# Altium PCB Core CNC Shield.PcbDoc (part 2 of 2)
Units mm, origin at the board's own origin, x right, y up, seen from the top; angles counter-clockwise.
Board outline 51.13 x 88 mm, 4 copper layers (Top signal, Ground, Power, Bottom signal); 105 components, 109 nets, 541 pads, 191 vias.
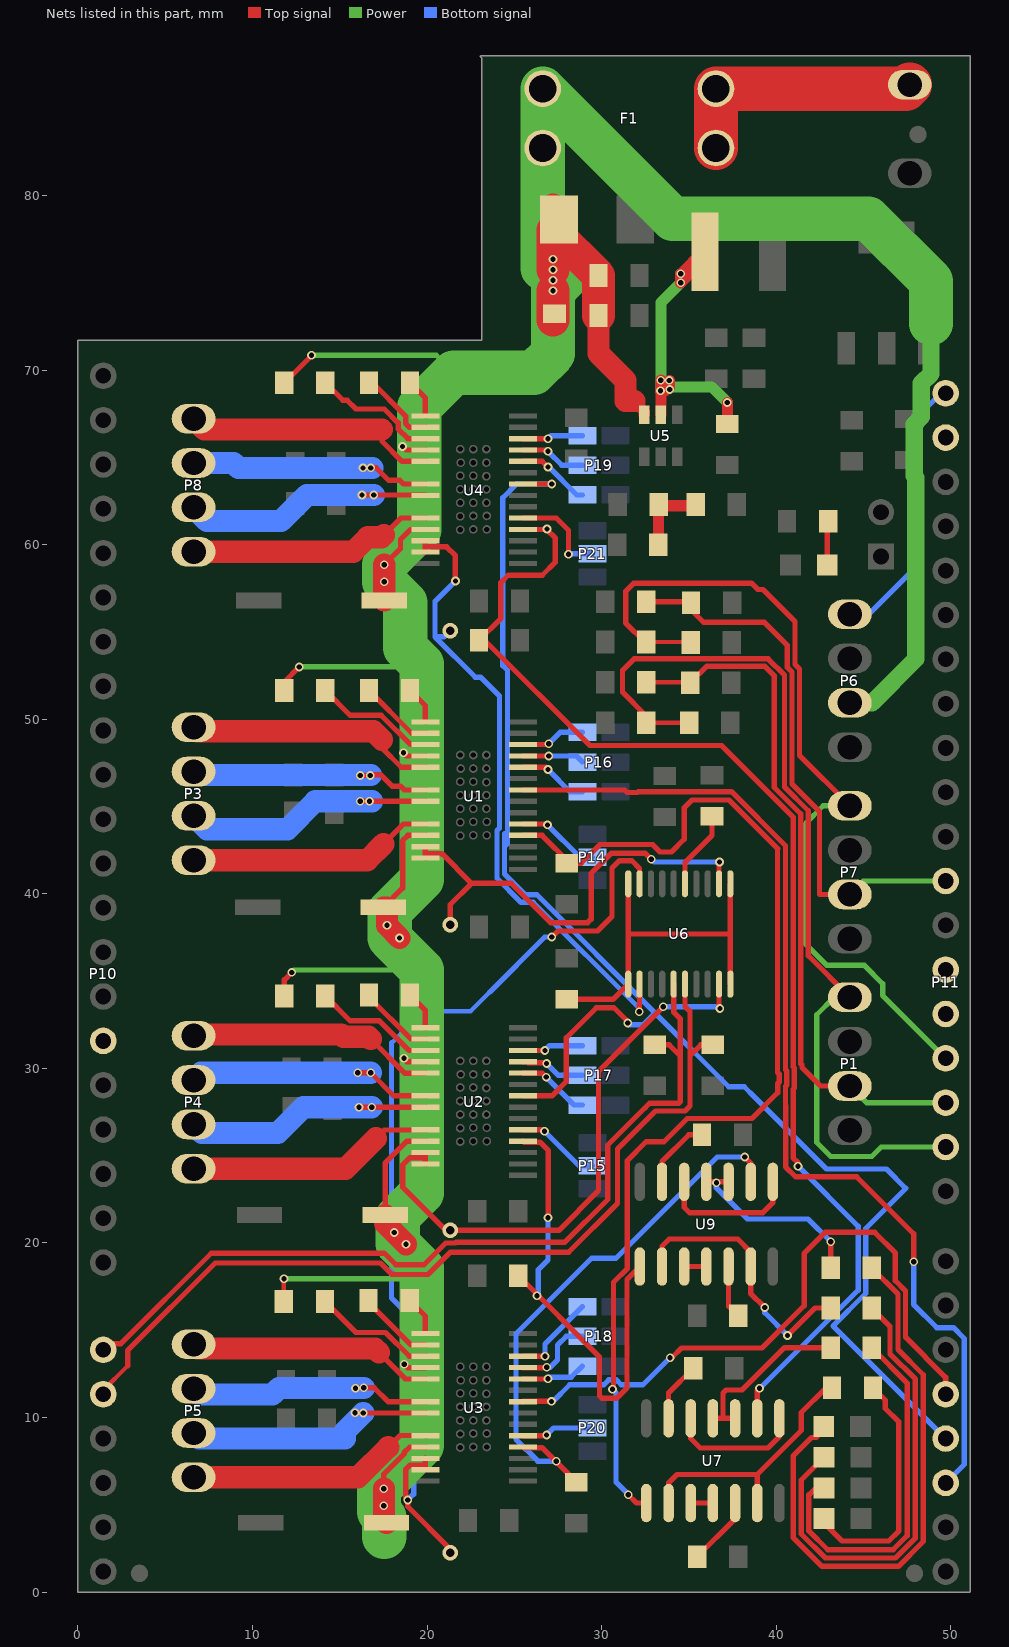
[diagram p4: the nets of this part, all layers, seen from the top]

## Via types
v1: diameter 0.5, hole 0.3, Top signal to Bottom signal, tented both sides, 191 vias

## Nets (pads, with @x,y where several pads share a name; then routed paths per layer and width w, separated by ;. In a path a pad name is that pad's centre, name@x,y a point inside that pad or via, vN(x,y) a via of type N, cw(c..) or ccw(c..) an arc to the next point about the centre after c; other vN are vias at no path point) (continued)
LEDX: R17.1 U7.2 U7.6 | length 15
  Top signal w0.305: U7.2@33.835,5.1 33.835,6.26 34.315,6.74 38.915,6.74 ; U7.6@38.915,5.1 38.915,6.74 ; R17.1@43.2,11.7 42.85,11.7 41.439,10.289 41.439,9.264 38.915,6.74
LEDY1: R19.1 U7.10 U7.11 | length 10
  Top signal w0.305: U7.11@36.375,9.95 36.95,9.95 ; U7.10@37.645,9.95 36.95,9.95 ; 38.088,11.613 38.05,11.575 ; R19.1@43.125,14 40.475,14 38.05,11.575 ; 36.95,9.95 36.95,11.4 37.125,11.575 38.05,11.575
LEDY2: R25.1 U9.2 U9.6 | length 15.5
  Top signal w0.305: U9.2@33.46,18.65 33.46,19.81 33.875,20.225 37.8,20.225 38.54,19.485 U9.6@38.54,18.65 38.54,17.11 v1(39.35,16.3) ; v1(40.65,14.7) 42.225,16.275 R25.1@43.125,16.275
  Bottom signal w0.305: v1(39.35,16.3) 39.35,16 v1(40.65,14.7)
LEDZ: R29.1 U9.10 U9.11 | length 10.9
  Top signal w0.305: U9.11@36,23.5 U9.10@37.27,23.5 ; R29.1@43.125,18.575 v1(43.125,20.075)
  Bottom signal w0.305: v1(36.575,23.45) 36.575,23.15 38.35,21.375 41.825,21.375 v1(43.125,20.075)
M1A1: P3.4 U1.5 | length 14.5
  Top signal w0.305: 17.425,48.825 17.425,48.35 18.525,47.25 U1.5@19.9,47.25
  Top signal w1.27: P3.4@6.625,49.545 6.859,49.311 16.939,49.311 17.425,48.825
M1A2: P3.3 U1.7 | length 14.4
  Top signal w0.305: v1(16.175,46.775) v1(16.75,46.775) 16.775,46.8 16.775,46.825 17.339,46.825 17.996,46.168 18.482,46.168 18.7,45.95 U1.7@19.9,45.95
  Bottom signal w1.27: P3.3@6.625,47.005 6.83,46.8 v1@16.775,46.8
M1B1: P3.1 U1.10 | length 14.1
  Top signal w0.305: 17.5,42.85 18.65,44 U1.10@19.9,44
  Top signal w1.27: P3.1@6.625,41.925 16.575,41.925 17.5,42.85
M1B2: P3.2 U1.8 | length 14.9
  Top signal w0.305: v1(16.175,45.3) 17.8,45.3 U1.8@19.9,45.3
  Bottom signal w1.27: P3.2@6.625,44.465 7.39,43.7 12,43.7 13.6,45.3 v1@16.85,45.3
  other v1: 16.7,45.3
M2A1: P4.4 U2.5 | length 14.2
  Top signal w0.305: 16.775,31.675 18.72,29.73 U2.5@19.9,29.73
  Top signal w1.27: P4.4@6.625,31.87 6.705,31.95 15.082,31.95 15.221,31.811 16.639,31.811 16.775,31.675
M2A2: P4.3 U2.7 | length 14.7
  Top signal w0.305: v1(16.025,29.75) v1(16.775,29.75) 18.095,28.43 U2.7@19.9,28.43
  Bottom signal w1.27: P4.3@6.625,29.33 7.045,29.75 v1(16.025,29.75) v1(16.775,29.75)
M2B1: P4.1 U2.10 | length 14.2
  Top signal w0.305: 17.075,26 17.55,26.475 19.895,26.475 U2.10@19.9,26.48
  Top signal w1.27: P4.1@6.625,24.25 15.325,24.25 17.075,26
M2B2: P4.2 U2.8 | length 14.8
  Top signal w0.305: v1(16.1,27.775) 16.105,27.78 v1(16.83,27.78) U2.8@19.9,27.78
  Bottom signal w1.27: P4.2@6.625,26.79 7.115,26.3 11.45,26.3 12.925,27.775 v1(16.1,27.775) 16.825,27.775 v1(16.83,27.78)
M3A1: P5.4 U3.5 | length 14.1
  Top signal w0.305: 17.25,13.72 18.76,12.21 U3.5@19.9,12.21
  Top signal w1.27: P5.4@6.625,14.195 6.859,13.961 17.009,13.961 17.25,13.72
M3A2: P5.3 U3.7 | length 14.4
  Top signal w0.305: v1(15.9,11.675) 15.925,11.7 16.975,11.7 17.765,10.91 U3.7@19.9,10.91
  Bottom signal w1.27: P5.3@6.625,11.655 6.955,11.325 11.15,11.325 11.525,11.7 v1(16.375,11.7)
M3B1: P5.1 U3.10 | length 14.3
  Top signal w0.305: 17.775,8.3 18.45,8.975 19.885,8.975 U3.10@19.9,8.96
  Top signal w1.27: P5.1@6.625,6.575 16.05,6.575 17.775,8.3
M3B2: P5.2 U3.8 | length 14.7
  Top signal w0.305: v1(15.875,10.275) 15.89,10.26 v1(16.35,10.26) U3.8@19.9,10.26
  Bottom signal w1.27: P5.2@6.625,9.115 6.94,8.8 15.3,8.8 15.3,9.21 v1(16.35,10.26)
M4A1: P8.4 U4.5 | length 14.7
  Top signal w0.305: 17.425,66.6 17.425,65.925 18.575,64.775 U4.5@19.9,64.775
  Top signal w1.27: P8.4@6.625,67.22 7.245,66.6 17.425,66.6
M4A2: P8.3 U4.7 | length 14.3
  Top signal w0.305: v1(16.325,64.4) 17.089,64.4 17.796,63.693 18.432,63.693 18.65,63.475 U4.7@19.9,63.475
  Bottom signal w1.27: P8.3@6.625,64.68 8.92,64.68 9.2,64.4 v1@16.875,64.4
  other v1: 16.775,64.4
M4B1: P8.1 U4.10 | length 14.1
  Top signal w0.305: 17.525,60.55 18.5,61.525 U4.10@19.9,61.525
  Top signal w1.27: P8.1@6.625,59.6 15.775,59.6 16.6,60.425 17.4,60.425 17.525,60.55
M4B2: P8.2 U4.8 | length 15.2
  Top signal w0.305: v1(16.275,62.85) 17.775,62.85 19.875,62.85 U4.8@19.9,62.825
  Bottom signal w1.27: P8.2@6.625,62.14 7.402,61.363 11.638,61.363 13.125,62.85 v1(16.95,62.85) 16.675,62.85
NetC1_1: C1.1 U1.2 | length 4.2
  Top signal w0.305: C1.1@16.675,51.65 19.125,49.2 U1.2@19.9,49.2
NetC1_2: C1.2 U1.1 | length 2.2
  Top signal w0.305: C1.2@19.025,51.65 19.9,50.775 U1.1@19.9,49.85
NetC2_1: C2.1 U2.2 | length 4.3
  Top signal w0.305: C2.1@16.675,34.2 16.675,34.075 19.07,31.68 U2.2@19.9,31.68
NetC2_2: C2.2 U2.1 | length 2.2
  Top signal w0.305: C2.2@19.025,34.2 19.9,33.325 U2.1@19.9,32.33
NetC3_1: C3.1 U3.2 | length 4.4
  Top signal w0.305: C3.1@16.65,16.7 16.65,16.6 19.09,14.16 U3.2@19.9,14.16
NetC3_2: C3.2 U3.1 | length 2.3
  Top signal w0.305: C3.2@19,16.7 19.9,15.8 U3.1@19.9,14.81
NetC7_1: C7.1 U1.3 | length 7
  Top signal w0.305: C7.1@14.175,51.65 15.6,50.225 17.375,50.225 19.05,48.55 U1.3@19.9,48.55
NetC10_1: C10.1 U2.3 | length 7
  Top signal w0.305: C10.1@14.175,34.15 15.6,32.725 17.274,32.725 18.974,31.025 19.895,31.025 U2.3@19.9,31.03
NetC13_1: C13.1 U3.3 | length 7.1
  Top signal w0.305: C13.1@14.15,16.65 15.925,14.875 17.624,14.875 18.989,13.51 U3.3@19.9,13.51
NetC19_1: C19.1 U4.2 | length 4.5
  Top signal w0.305: C19.1@16.675,69.275 16.875,69.275 18.775,67.375 18.775,66.95 19,66.725 U4.2@19.9,66.725
NetC19_2: C19.2 U4.1 | length 2.3
  Top signal w0.305: C19.2@19.025,69.275 19.9,68.4 U4.1@19.9,67.375
NetC23_1: C23.1 U4.3 | length 7.3
  Top signal w0.305: C23.1@14.175,69.275 15.175,68.275 15.425,68.275 15.925,67.775 17.55,67.775 18.343,66.982 18.343,66.632 18.9,66.075 U4.3@19.9,66.075
NetC25_1: C25.1 R26.1 R27.2 | length 4.6
  Top signal w0.635: C25.1@33.25,60 R27.2@33.25,62.203 ; R27.2@33.275,62.3 33.25,62.275 R27.2@33.25,62.231 ; R27.2@33.348,62.104 R27.2@33.25,62.203 ; R26.1@35.316,62.231 R27.2@33.25,62.231 ; R27.2@33.25,62.203 R27.2@33.25,62.231 ; R27.2@33.25,62.203 33.221,62.231 R27.2@33.25,62.231
NetD2_2: D2.2 R17.2 | length 14
  Top signal w0.305: D2.2@42.75,4.225 42.75,3.95 43.775,2.925 46.45,2.925 47.025,3.5 47.025,9.75 46.25,10.525 46.25,11 R17.2@45.55,11.7
NetD3_1: D3.1 R14.2 | length 2.5
  Top signal w0.305: D3.1@42.925,58.825 R14.2@42.925,61.3
NetD4_2: D4.2 R19.2 | length 21.1
  Top signal w0.305: D4.2@42.75,5.95 42.25,5.95 41.871,5.571 41.871,3.509 42.955,2.425 46.7,2.425 47.5,3.225 47.5,11.975 R19.2@45.475,14
NetD5_2: D5.2 R25.2 | length 26.7
  Top signal w0.305: D5.2@42.75,7.725 41.439,6.414 41.439,3.33 42.819,1.95 46.836,1.95 47.975,3.089 47.975,12.2 46.525,13.65 46.525,15.225 R25.2@45.475,16.275
NetD6_2: D6.2 R29.2 | length 32.8
  Top signal w0.305: D6.2@42.725,9.475 42.725,9.295 42.287,8.858 42.033,8.858 40.975,7.8 40.975,3.125 42.625,1.475 47,1.475 48.425,2.9 48.425,12.45 46.975,13.9 46.975,17.075 R29.2@45.475,18.575
NetF1_1: F1.1 P2.2 | length 14.6
  Top signal w2.54: F1.1@36.55,82.725 F1.1@36.55,86.125 47.42,86.125 P2.2@47.65,86.355
NetP14_1: P14.1 U1.19 | length 4.8
  Top signal w0.305: U1.19@25.5,44 26.85,44 v1(26.9,43.95)
  Bottom signal w0.305: v1(26.9,43.95) 28.75,42.1 P14.1@29.475,42.1
NetP15_1: P15.1 U2.19 | length 4.8
  Top signal w0.305: U2.19@25.5,26.48 26.645,26.48 v1(26.725,26.4)
  Bottom signal w0.305: v1(26.725,26.4) 28.7,24.425 P15.1@29.475,24.425
NetP16_4: P16.4 U1.26 | length 3.7
  Top signal w0.305: U1.26@25.5,48.55 26.925,48.55 v1(26.975,48.6)
  Bottom signal w0.305: v1(26.975,48.6) 27.625,49.25 P16.4@28.9,49.25
NetP16_5: P16.5 U1.25 | length 3.5
  Top signal w0.305: U1.25@25.5,47.9 v1(26.975,47.9)
  Bottom signal w0.305: v1(26.975,47.9) 28.55,47.9 P16.5@28.9,47.55
NetP16_6: P16.6 U1.24 | length 4
  Top signal w0.305: U1.24@25.5,47.25 26.8,47.25 v1(26.925,47.125)
  Bottom signal w0.305: v1(26.925,47.125) 28.2,45.85 P16.6@28.9,45.85
NetP17_4: P17.4 U2.26 | length 3.5
  Top signal w0.305: U2.26@25.5,31.03 26.745,31.03 v1(26.75,31.025)
  Bottom signal w0.305: v1(26.75,31.025) 27.025,31.3 P17.4@28.9,31.3
NetP17_5: P17.5 U2.25 | length 3.7
  Top signal w0.305: U2.25@25.5,30.38 25.73,30.38 25.785,30.325 26.8,30.325 v1(26.85,30.275)
  Bottom signal w0.305: v1(26.85,30.275) 27.525,29.6 P17.5@28.9,29.6
NetP17_6: P17.6 U2.24 | length 4.2
  Top signal w0.305: U2.24@25.5,29.73 26.595,29.73 v1(26.825,29.5)
  Bottom signal w0.305: v1(26.825,29.5) 28.425,27.9 P17.6@28.9,27.9
NetP18_4: P18.4 U3.26 | length 5
  Top signal w0.305: U3.26@25.5,13.51 v1(26.76,13.51)
  Bottom signal w0.305: v1(26.76,13.51) 26.76,14.21 P18.4@28.9,16.35
NetP18_5: P18.5 U3.25 | length 4.6
  Top signal w0.305: U3.25@25.5,12.86 26.84,12.86 v1(26.855,12.875)
  Bottom signal w0.305: v1(26.855,12.875) 27.05,12.875 27.475,13.3 27.475,14.15 27.975,14.65 P18.5@28.9,14.65
NetP18_6: P18.6 U3.24 | length 3.7
  Top signal w0.305: U3.24@25.5,12.21 26.91,12.21 v1(26.925,12.225)
  Bottom signal w0.305: v1(26.925,12.225) 27.007,12.307 28.257,12.307 P18.6@28.9,12.95
NetP19_4: P19.4 U4.26 | length 3.5
  Top signal w0.305: U4.26@25.5,66.075 v1(26.925,66.075)
  Bottom signal w0.305: v1(26.925,66.075) 27.1,66.25 P19.4@28.9,66.25
NetP19_5: P19.5 U4.25 | length 3.8
  Top signal w0.305: U4.25@25.5,65.425 26.85,65.425 v1(26.925,65.35)
  Bottom signal w0.305: v1(26.925,65.35) 27.725,64.55 P19.5@28.9,64.55
NetP19_6: P19.6 U4.24 | length 4.2
  Top signal w0.305: U4.24@25.5,64.775 26.6,64.775 v1(26.925,64.45)
  Bottom signal w0.305: v1(26.925,64.45) 26.975,64.45 28.575,62.85 P19.6@28.9,62.85
NetP20_1: P20.1 U3.19 | length 4.2
  Top signal w0.305: U3.19@25.5,8.96 26.81,8.96 v1(26.85,9)
  Bottom signal w0.305: v1(26.85,9) 27.25,9.4 P20.1@29.475,9.4
NetP21_1: P21.1 U4.19 | length 5.7
  Top signal w0.305: U4.19@25.5,61.525 27.4,61.525 28.1,60.825 v1(28.1,59.45)
  Bottom signal w0.305: v1(28.1,59.45) 28.125,59.475 P21.1@29.475,59.475
NetR8_1: R8.1 U6.1 U6.10 U6.11 U6.20 | length 21.2
  Top signal w0.305: R8.1@27.996,33.957 30.657,33.957 U6.1@31.525,34.825 31.525,37.7 ; U6.20@31.525,40.575 31.525,37.7 ; 37.3,37.7 31.525,37.7 ; U6.10@37.375,34.825 U6.11@37.375,40.575
NetR9_1: R9.1 U6.15 | length 4.5
  Top signal w0.305: U6.15@34.775,40.575 34.775,41.8 36.325,43.35 R9.1@36.325,44.45
NetR21_1: R21.1 U7.5 | length 4
  Top signal w0.305: R21.1@35.475,2.025 37.645,4.195 U7.5@37.645,5.1
NetR23_1: R23.1 U7.13 | length 3.5
  Top signal w0.305: U7.13@33.835,9.95 33.835,11.41 R23.1@35.25,12.825
NetR30_1: R30.1 U9.13 | length 4.1
  Top signal w0.305: U9.13@33.46,23.5 33.46,24.66 35,26.2 R30.1@35.75,26.2
NetR31_1: R31.1 U9.5 | length 3.1
  Top signal w0.305: U9.5@37.27,18.65 37.27,16.38 R31.1@37.825,15.825
NetU7_3: U7.3 U7.4 | length 1.3
  Top signal w0.305: U7.3@35.105,5.1 U7.4@36.375,5.1
NetU7_8: U7.8 U7.12 | length 7.8
  Top signal w0.305: U7.12@35.105,9.95 35.105,8.795 35.65,8.25 39.525,8.25 40.185,8.91 U7.8@40.185,9.95
NetU9_3: U9.3 U9.4 | length 1.3
  Top signal w0.305: U9.3@34.73,18.65 U9.4@36,18.65
NetU9_8: U9.8 U9.12 | length 8.1
  Top signal w0.305: U9.12@34.73,23.5 34.73,22.045 35.05,21.725 39.225,21.725 39.81,22.31 U9.8@39.81,23.5
P0W: T1.1 U1.12 U1.13 U6.12 | length 26.7
  Top signal w0.305: U1.13@19.9,42.05 19.9,42.4 ; U1.12@19.9,42.7 19.9,42.4 ; T1.1@21.325,38.234 21.325,39.375 22.55,40.6 ; v1(32.85,41.975) 32.493,42.332 30.557,42.332 29.4,41.175 29.4,38.55 29.2,38.35 27.075,38.35 24.825,40.6 22.55,40.6 ; U6.12@36.725,40.575 v1@36.725,41.825 ; 19.9,42.4 20,42.3 20.85,42.3 22.55,40.6
  Bottom signal w0.305: v1(32.85,41.975) 33,41.825 v1(36.75,41.825)
P1W: T3.1 U2.12 U2.13 U6.9 | length 33.1
  Top signal w0.305: U2.13@19.9,24.53 19.9,24.875 ; U2.12@19.9,25.18 19.9,24.875 ; T3.1@21.075,20.725 18.6,23.2 18.6,24.475 19,24.875 19.9,24.875 ; T3.1@21.325,20.725 27.55,20.725 29.825,23 29.825,29.825 v1(33.525,33.525) ; v1@36.725,33.425 U6.9@36.725,34.825
  Bottom signal w0.305: v1(33.525,33.525) 36.675,33.525 v1(36.775,33.425)
P2W: T2.1 U3.12 U3.13 U6.19 | length 56.1
  Top signal w0.305: U3.13@19.9,7.01 19.9,7.275 ; U3.12@19.9,7.66 19.9,7.275 ; T2.1@21.325,2.25 21.325,2.475 18.895,4.905 v1(18.895,5.275) 18.775,5.395 18.775,7.025 19.025,7.275 19.9,7.275 ; v1(27.15,37.525) 27.5,37.875 29.775,37.875 30.6,38.7 30.6,41.475 31.025,41.9 31.725,41.9 32.175,41.45 U6.19@32.175,40.575
  Bottom signal w0.254: 17.963,31.475 17.995,31.475 19.795,33.275 22.495,33.275 23.595,34.375
  Bottom signal w0.305: 17.963,31.475 17.963,21.129 17.906,21.129 17.596,20.819 17.596,20.381 17.906,20.071 17.963,20.071 17.963,16.844 18.852,15.955 ; v1(18.895,5.275) 19.229,5.609 19.229,15.578 18.895,15.912 ; 23.595,34.375 26.745,37.525 v1(27.15,37.525)
P3W: T4.1 U4.12 U4.13 U6.2 | length 37.5
  Top signal w0.305: U4.13@19.9,59.575 19.9,59.875 ; U4.12@19.9,60.225 19.9,59.875 ; v1(21.625,57.925) 21.625,59.375 21.125,59.875 19.9,59.875 ; v1(32.154,33.25) 32.154,33.629 ; v1@32.175,33.45 U6.2@32.175,34.825
  Bottom signal w0.305: T4.1@21.325,55.075 20.971,54.721 20.453,54.721 ; v1(21.625,57.925) 20.453,56.753 20.453,54.721 ; v1(32.154,33.25) 32.154,33.446 26.086,39.514 25.386,39.514 24.007,40.893 24.007,43.62 24.15,43.763 24.15,51.324 23.06,52.414 22.761,52.414 20.453,54.721
"POT SCL": P10.22 R11.1 U6.5 | length 49.8
  Top signal w0.254: P10.22@1.449,14.096 P10.22@1.576,14.223
  Top signal w0.305: P10.22@1.576,14.223 2.451,14.223 7.637,19.409 17.556,19.409 18.215,18.75 19.825,18.75 21.071,19.996 21.627,19.996 21.665,20.034 27.884,20.034 30.35,22.5 30.35,25.606 32.489,27.746 32.494,27.746 32.757,28.009 34.434,28.009 34.5,28.075 34.5,30.725 ; R11.1@33.05,31.35 33.875,31.35 34.5,30.725 ; U6.5@34.125,34.825 34.125,33.225 34.5,32.85 34.5,30.725
"POT SDA": P10.23 R10.1 U6.6 | length 51.9
  Top signal w0.254: P10.23@1.449,11.556 2.846,12.953
  Top signal w0.305: 2.846,12.953 2.846,13.828 7.868,18.85 17.325,18.85 17.984,18.191 20.056,18.191 21.34,19.475 28.115,19.475 30.909,22.269 30.909,25.375 33.095,27.561 34.776,27.561 35.059,27.844 35.059,30.725 ; U6.6@34.775,34.825 34.775,33.55 35.059,33.266 35.059,30.725 ; R10.1@36.375,31.35 35.684,31.35 35.059,30.725
PWM0: P6.4 P11.54 | length 15.7
  Bottom signal w0.305: P6.4@44.225,56.02 45.32,56.02 47.925,58.625 47.925,67.175 47.938,67.163 49.45,68.675 P11.54@49.71,68.675
PWM1: P11.53 | length 0.6
  Bottom signal w0.305: P11.53@49.137,66.356 P11.53@49.709,66.356
RESET: P10.16
STP1: P11.30 U1.22 | length 60.2
  Top signal w0.305: U1.22@25.5,45.95 31.325,45.95 31.468,45.807 32.058,45.807 32.106,45.854 37.431,45.854 40.532,42.754 40.532,29.928 40.611,29.848 40.611,29.052 40.532,28.972 40.532,27.868 40.543,27.857 40.543,24.358 41.108,23.793 44.607,23.793 47.875,20.525 v1(47.875,18.925)
  Bottom signal w0.305: v1(47.875,18.925) 47.875,16.475 49.2,15.15 50.15,15.15 50.775,14.525 50.775,7.32 P11.30@49.71,6.255
STP2: P11.31 U2.22 U4.22 | length 88.3
  Top signal w0.305: U2.22@25.5,28.43 27.155,28.43 27.975,29.25 27.975,31.75 29.7,33.475 30.7,33.475 31.5,32.675 v1(31.5,32.6) ; U4.22@25.5,63.475 v1(27.15,63.475)
  Bottom signal w0.305: 24.438,43.441 24.438,42.721 ; v1(27.15,63.475) 25.125,63.475 24.341,62.691 24.341,53.072 24.607,52.806 24.607,42.89 24.438,42.721 ; v1(31.5,32.6) 31.6,32.5 32.375,32.5 33.055,33.18 ; P11.31@49.71,8.795 43.258,15.247 45.132,17.121 45.132,20.833 47.424,23.126 46.318,24.232 42.879,24.232 38.754,28.356 38.754,28.369 38.174,28.95 37.286,28.95 33.055,33.18 ; 24.438,42.721 24.438,41.147 25.64,39.946 26.29,39.946 33.055,33.18
STP3: P11.32 U3.22 | length 37.4
  Top signal w0.254: P11.32@49.385,11.335 P11.32@49.71,11.335
  Top signal w0.305: U3.22@25.5,10.91 25.515,10.925 v1(27.125,10.925) ; v1(33.925,13.425) 34.018,13.425 34.575,13.982 39.177,13.982 41.6,16.405 41.6,19.4 42.804,20.604 45.646,20.604 46.825,19.425 46.825,17.836 47.407,17.254 47.407,14.604 49.71,12.301 P11.32@49.71,11.335
  Bottom signal w0.305: v1(27.125,10.925) 27.225,10.925 28.175,11.875 30.127,11.875 30.407,12.155 30.846,12.155 31.126,11.875 32.375,11.875 v1(33.925,13.425)
SW: C9.1 L1.1 U5.2 | length 21.1
  Top signal w0.635: v1(33.378,68.812) v1@33.391,68.812 ; U5.2@33.391,67.443 v1@33.391,68.812 ; v1(33.391,69.418) v1@33.391,69.037 ; v1(33.878,69.412) 33.878,69.012 v1@33.853,69.037 ; L1.1@35.931,76.403 v1(34.534,75.006) v1(34.534,75.514) 35.804,76.784 L1.1@35.931,76.784 ; C9.1@37.201,66.91 v1(37.201,68.148) ; v1@33.391,68.812 v1@33.391,69.037 ; v1@33.391,68.812 v1@33.403,68.812 ; v1@33.391,69.037 v1@33.853,69.037 ; v1@33.391,69.037 33.428,69 v1@33.428,68.812 ; v1@33.403,68.812 v1@33.428,68.812 ; v1@33.403,68.812 33.428,68.787 v1@33.428,68.812 ; v1@33.428,68.812 33.628,68.812 v1@33.853,69.037
  Power w0.635: v1(34.534,75.514) v1(34.534,75.006) 33.391,73.863 v1(33.391,69.418) 33.391,69.037 36.312,69.037 v1(37.201,68.148)
  Bottom signal w0.635: v1(33.378,68.812) 33.403,68.812 v1@33.391,68.824 ; v1(34.534,75.006) v1(34.534,75.514)
  other v1: 33.903,68.887
VM: C4.1 C5.1 C6.1 C7.2 C10.2 C12.2 C13.2 C15.1 C21.1 C23.2 D1.2 F1.2 P6.2 R15.2 U1.4 U1.11 U2.4 U2.11 U3.4 U3.11 U4.4 U4.11 U5.3 | length 241.7
  Top signal w0.254: C13.2@11.8,16.65 v1(11.8,17.95)
  Top signal w0.305: C10.2@11.825,34.15 11.825,35.075 v1(12.25,35.5) ; C7.2@11.825,51.65 11.825,52.15 v1(12.675,53) v1@12.725,53.05 ; C23.2@11.825,69.275 13.375,70.825 v1(13.375,70.85) ; C4.1@17.5,39.225 18.6,40.325 18.6,43.05 18.9,43.35 U1.11@19.9,43.35 ; v1(17.525,5.925) 17.525,6.757 18.689,7.921 18.689,7.989 19.01,8.31 U3.11@19.9,8.31 ; v1(17.55,58.85) 18.475,59.775 18.475,60.3 19.05,60.875 U4.11@19.9,60.875 ; C5.1@17.6,21.6 17.6,24.575 18.855,25.83 U2.11@19.9,25.83 ; v1(18.6,65.625) 18.8,65.425 U4.4@19.9,65.425 ; v1(18.65,48.075) 18.825,47.9 U1.4@19.9,47.9 ; v1(18.675,30.575) 18.65,30.575 18.845,30.38 U2.4@19.9,30.38 ; v1@18.7,13.1 v1(18.7,13.05) 18.89,12.86 U3.4@19.9,12.86
  Top signal w0.635: 31.887,68.222 32.441,67.668 U5.3@32.441,67.443
  Top signal w1.27: C4.1@17.5,39.225 17.7,39.225 v1(17.7,38.2) v1(18.425,37.475) ; v1(17.525,5.925) v1(17.525,4.95) 17.525,4.125 C6.1@17.675,3.975 ; C21.1@17.55,56.8 v1(17.55,57.875) v1(17.55,58.85) ; C5.1@17.6,21.6 17.6,21.125 v1(18.125,20.6) v1(18.8,19.925) ; v1(27.22,74.55) v1(27.22,75.15) v1(27.22,75.75) ; C15.1@29.788,75.45 C15.1@29.818,75.42 ; C12.2@29.818,73.134 29.818,70.957 31.368,69.407 31.368,68.222 31.887,68.222 ; D1.2@27.208,78.03 27.208,79.484 27.22,79.472 27.22,78.018 D1.2@27.208,78.03
  Top signal w1.905: R15.2@27.22,72.875 v1(27.22,74.55) ; v1(27.22,75.75) v1(27.22,76.35) 27.22,78.018 C15.1@29.818,75.42 C12.2@29.818,73.134
  Power w0.305: v1(11.8,17.95) 19.062,17.95 19.7,18.588 ; v1(12.25,35.5) 12.386,35.636 19.7,35.636 ; v1(12.675,53) 19.538,53 19.7,53.162 ; v1(13.375,70.85) 20.525,70.85 21.525,69.85
  Power w1: P6.2@44.225,50.94 45.49,50.94 48.002,53.452 48.002,63.846 47.9,63.948 47.9,66.913 48.321,67.334 48.321,68.1 48.321,69.25 48.87,69.799 48.87,72.675
  Power w2.54: 17.55,3.177 17.55,4.291 17.248,4.593 17.248,5.957 19.7,8.409 19.7,18.588 18.328,19.96 18.328,21.49 19.7,22.862 19.7,35.636 17.867,37.469 17.867,38.999 19.7,40.832 19.7,53.162 18.756,54.106 18.756,56.669 v1(17.55,57.875) v1(17.55,58.85) 19.55,60.85 19.55,67.875 21.525,69.85 26.12,69.85 27.22,70.95 v1(27.22,74.55) ; 26.63,75.835 F1.2@26.63,82.725 F1.2@26.63,86.125 34.08,78.675 45.279,78.675 48.87,75.084 48.87,72.675 ; v1(27.22,76.35) v1(27.22,75.75) v1(27.22,75.15) v1(27.22,74.55) ; 27.98,75.31 v1(27.22,74.55)
"X FAULT": R32.2 U1.18 U7.1 | length 64.8
  Top signal w0.305: U1.18@25.5,43.35 26.595,43.35 28.195,41.75 28.825,41.75 29.9,42.825 32.925,42.825 33.35,42.4 34,42.4 34.725,43.125 34.725,44.925 35.175,45.375 37.3,45.375 40.1,42.575 40.075,42.55 40.075,29.774 40.179,29.669 40.179,29.231 40.082,29.133 40.082,28.607 38.604,27.129 34.904,27.129 33.575,25.8 32.55,25.8 31.475,24.725 31.475,18.546 30.676,17.747 30.676,11.576 v1(30.626,11.626) ; v1(31.525,5.575) 32,5.1 U7.1@32.565,5.1
  Bottom signal w0.305: v1(30.626,11.626) 30.825,11.427 30.825,6.3 31.45,5.675 31.45,5.65 v1(31.525,5.575)
"X MAX": C32.2 P1.4 P11.37 R24.2 | length 53.6
  Top signal w0.254: R24.2@32.55,49.8 C32.2@35.025,49.8
  Top signal w0.305: R24.2@32.55,49.8 32.55,50.2 31.2,51.55 31.2,52.8 31.861,53.461 39.539,53.461 40.475,52.525 40.475,46.121 41.839,44.758 41.839,36.456 P1.4@44.225,34.07
  Power w0.305: P1.4@44.225,34.07 43.32,34.07 42.325,33.075 42.325,25.75 43.125,24.95 45.475,24.95 46.02,25.495 P11.37@49.71,25.495
"X MIN": P11.40
"Y1 FAULT": R35.2 U4.18 U7.9 | length 71.6
  Top signal w0.305: U4.18@25.5,60.875 v1@26.85,60.875 ; v1(26.875,60.9) v1@26.85,60.875 ; U7.9@38.915,9.95 38.915,11.54 v1(39.05,11.675) ; v1(41.25,24.4) 41.25,24.6 40.975,24.875 40.975,28.805 41.043,28.873 41.043,30.027 40.975,30.095 40.975,44.4 36.875,48.5 29.325,48.5 23.3,54.525 R35.2@22.975,54.525 24.225,55.775 24.225,57.825 24.65,58.25 26.6,58.25 27.35,59 27.35,60.375 v1@26.85,60.875
  Bottom signal w0.305: v1(39.05,11.675) 39.05,11.65 44.7,17.3 44.7,20.95 v1(41.25,24.4)
"Y2 FAULT": R34.2 U2.18 U9.1 | length 28.2
  Top signal w0.305: R34.2@25.225,18.125 29.875,13.475 29.875,11.25 30.029,11.096 30.846,11.096 31.45,11.7 31.45,17.91 U9.1@32.19,18.65 ; U2.18@25.5,25.83 25.555,25.775 26.475,25.775 26.95,25.3 26.95,21.5 26.925,21.475 v1(26.925,21.45) v1@26.95,21.425
  Bottom signal w0.305: v1(26.3,16.975) 26.375,17.05 26.375,18.475 26.925,19.025 v1(26.925,21.45)
"Y MAX": C36.2 P1.2 P11.38 R22.2 | length 40.1
  Top signal w0.254: R22.2@32.55,52.125 35.05,52.125 C36.2@35.075,52.1
  Top signal w0.305: C36.2@35.075,52.1 36.004,53.029 39.36,53.029 39.882,52.508 39.882,46.104 41.407,44.579 41.407,30.274 41.475,30.206 41.475,30.05 42.535,28.99 P1.2@44.225,28.99
  Power w0.305: P1.2@44.225,28.99 45.18,28.035 P11.38@49.71,28.035
"Y MIN": P11.41
"Z FAULT": R33.2 U3.18 U9.9 | length 31.6
  Top signal w0.305: U3.18@25.5,8.31 25.535,8.275 26.575,8.275 R33.2@28.55,6.3 ; v1(38.2,24.925) 38.54,24.585 U9.9@38.54,23.5
  Bottom signal w0.305: v1(27.4,7.5) 26.35,7.5 25.1,8.75 25.1,14.8 29.425,19.125 30.825,19.125 36.625,24.925 v1(38.2,24.925)
"Z MAX": C37.2 P7.4 P11.39 R16.2 | length 49.7
  Top signal w0.254: R16.2@32.575,54.4 R16.2@32.55,54.425 C37.2@35.075,54.425
  Top signal w0.305: R16.2@32.55,54.425 32.475,54.425 31.375,55.525 31.375,57.325 31.85,57.8 38.58,57.8 38.948,57.432 39.243,57.432 41.075,55.6 41.075,53.146 41.339,52.883 41.339,47.931 P7.4@44.225,45.045
  Power w0.305: P7.4@44.225,45.045 42.695,45.045 41.675,44.025 41.675,37.125 42.9,35.9 45.05,35.9 46.1,34.85 46.1,34.185 P11.39@49.71,30.575
"Z MIN": C38.2 P7.2 P11.43 R20.2 | length 31.9
  Top signal w0.305: R20.2@32.55,56.725 C38.2@35.075,56.725 ; C38.2@35.125,56.675 35.125,56.275 35.85,55.55 39.325,55.55 40.643,54.232 40.643,52.967 40.907,52.704 40.907,46.3 42.485,44.722 42.485,39.965 P7.2@44.225,39.965
  Power w0.305: P7.2@44.225,39.965 44.995,40.735 P11.43@49.71,40.735
pads on no net: ?.0 P10.1 P10.2 P10.3 P10.4 P10.5 P10.6 P10.7 P10.8 P10.9 P10.10 P10.11 P10.12 P10.13 P10.21 P10.24 P10.25 P10.26 P10.27 P11.28 P11.29 P11.36 P11.44 P11.45 P11.46 P11.47 P11.51 P11.52 U1.0 U1.23 U1.27 U2.0 U2.23 U2.27 U3.0 U3.23 U3.27 U4.0 U4.23 U4.27 U6.14

## Polygon pours and split planes (outlines as drawn)
SW on Power "GND plane" (solid, remove dead copper, pour order 11): 37.201,68.148 34.534,70.815 34.534,75.514 34.534,75.006 33.578,74.05 33.391,73.863 33.391,69.037 35.953,69.037 36.078,68.912 36.842,68.148 37.201,68.148
GND on Top signal "GND plane" (solid, remove dead copper, pour order 16): 24.3,21.925 26.775,21.925 29.1,24.25 29.125,24.275 29.125,30.725 29.125,30.85 33.939,35.664 33.975,35.7 37.475,35.7 37.475,32.8 37.175,32.5 37.2,32.475 37.2,29.4 37.2,28.175 36.45,27.425 35.925,26.9 33.925,26.9 33.925,24.225 28.375,18.675 28.125,18.425 24.275,18.425 24.275,21.9 24.3,21.925
GND on Top signal "GND plane" (solid, remove dead copper, pour order 15): 37.5,42.825 24.2,42.825 24.175,42.8 24.225,42.75 24.225,36.525 37.5,36.525 37.5,42.825
GND on Top signal "GND plane" (solid, remove dead copper, pour order 12): 3.375,70.75 3.45,70.675 27.225,70.675 27.225,2.325 5.125,2.325 3.4,2.325 3.375,2.35 3.375,70.75
GND on Top signal "GND plane" (solid, remove dead copper, pour order 10): 30.9,41.55 30.925,41.525 38,41.525 38,33.85 30.9,33.85 30.9,41.55
GND on Top signal "GND plane" (solid, remove dead copper, pour order 13): 34.178,67.212 34.178,68.412 34.678,68.912 34.678,69.636 34.278,70.036 34.107,69.864 32.026,69.864 32.026,70.012 32.026,73.482 31.436,74.072 31.436,77.547 42.744,77.547 42.778,77.512 43.678,76.612 43.678,72.912 43.678,67.545 43.551,67.418 43.345,67.212 34.378,67.212
GND on Bottom signal "GND plane" (solid, remove dead copper, pour order 18): 19.075,58.075 19.075,58.8 21.9,61.625 21.925,61.65 23.425,61.65 23.425,56.2 23.4,56.175 25.05,54.525 25.05,49.7 25.05,42.425 27.9,39.575 30.15,37.325 31.9,37.325 33.075,37.325 34.225,36.175 34.125,36.075 34.125,33.225 34.075,33.225 32.2,31.35 29.425,34.125 29.3,34.125 29.3,33.05 30.775,31.575 23,39.35 23,41.875 23,50.475 20.5,52.975 19.1,54.375 19.1,58.075
GND on Bottom signal "GND plane" (solid, remove dead copper, pour order 17): 26.475,38.55 28.175,36.85 28.175,34.9 28.175,29.875 21.225,22.925 20.025,21.725 20.025,12.55 20.025,5.175 19.225,4.375 19.2,4.35 18.2,4.35 18.2,4.975 17.775,5.4 16.95,6.225 16.95,17.775 16.95,32.1 19.075,34.225 23.35,38.5 26.425,38.5
GND on Ground "GND plane" (solid, remove dead copper, pour order 25): 23.125,88 51.125,88 51.125,0 0,0 0,71.7 23.125,71.7 23.125,71.825 23.125,88

## Silkscreen, mask and mechanical layers (free items; w line width, h text height)
Top Overlay:
  text "fuse" at 30.009,84.802 h0.72
  text "12-24v" at 40.075,82.175 h0.72 r90
  text "SS34" at 29.775,78.475 h0.72
  text "15uH" at 37.9,75.75 h0.72 r90
  text "100N" at 29.45,74.975 h0.72
  text "LT1117" at 44.2,74 h1.52
  text "10U" at 29.725,72.75 h0.72
  text "510K" at 27.625,70.775 h0.72 r90
  text "22U" at 39.2,69.775 h0.72 r90
  text "22U" at 36.85,69.475 h0.72 r90
  text "100N" at 11.525,69 h0.72
  text "10N" at 16.675,68.975 h0.72
  text "10U" at 44.7,65.025 h0.72 r90
  text "13.3K" at 28.9,64.55 h0.72 r90
  text "100N" at 37.725,64.55 h0.72 r90
  text "100N" at 47.7,64.55 h0.72 r90
  text "0.1" at 12.486,64.302 h0.72
  text "TPS5420" at 33.35,64.2 h1.52 r90
  text "0.1" at 12.65,62.075 h0.72
  text "100K" at 30.575,61.9 h0.72
  text "49.9" at 35.45,61.9 h0.72
  text "330" at 40.8,60.95 h0.72
  text "DRV8825" at 23.2,60.3 h1.52 r90
  text "75P" at 31,59.725 h0.72
  text "- 5V +" at 48.375,58.5 h0.72 r90
  text "Y axis" at 3.95,56.85 h0.72
  text "470N" at 22.925,56.475 h0.72
  text "100N" at 34.95,56.25 h0.72
  text "1K" at 30,56.025 h1.52
  text "PWM0" at 48.4,55.15 h0.72 r90
  text "100U" at 12.45,55.05 h0.72
  text "10K" at 23.125,54.125 h0.72
  text "100N" at 35,54.075 h0.72
  text "1K" at 29.95,53.725 h1.52
  text "GND" at 48.4,52.65 h0.72 r90
  text "100N" at 35.1,51.725 h0.72
  text "1K" at 30.15,51.55 h1.52
  text "10N" at 16.45,51.25 h0.72
  text "100N" at 11.6,51.225 h0.72
  text "VM" at 48.4,50.525 h0.72 r90
  text "100N" at 35.275,49.525 h0.72
  text "1K" at 30.3,49.375 h1.52
  text "GND" at 48.4,47.34 h0.72 r90
  text "0.1" at 12.436,46.502 h0.72
  text "Z+" at 48.4,45.045 h0.72 r90
  text "100N" at 34.1,44.35 h0.72 r90
  text "0.1" at 12.361,44.277 h0.72
  text "100K" at 36.525,44.15 h0.72 r90
  text "DRV8825" at 23.2,43.175 h1.52 r90
  text "GND" at 48.4,41.915 h0.72 r90
  text "Z-" at 48.4,39.965 h0.72 r90
  text "10K" at 28.425,39.525 h0.72 r90
  text "X axis" at 4.15,39.1 h0.72
  text "470N" at 22.961,37.777 h0.72
  text "100U" at 12.036,37.402 h0.72
  text "MCP44X1" at 31.375,37.05 h1.52
  text "GND" at 48.4,36.79 h0.72 r90
  text "33K" at 28.425,34.15 h0.72 r90
  text "X+" at 48.4,34.07 h0.72 r90
  text "10N" at 16.55,33.775 h0.72
  text "100N" at 11.625,33.7 h0.72
  text "GND" at 48.4,30.99 h0.72 r90
  text "0.1" at 12.436,29.602 h0.72
  text "2K2" at 36.748,29.386 h0.72 r90
  text "2K2" at 33.35,29.225 h0.72 r90
  text "Y+" at 48.4,28.99 h0.72 r90
  text "0.1" at 12.186,27.327 h0.72
  text "1K" at 36.061,25.877 h0.72
  text "DRV8825" at 23.025,25.6 h1.52 r90
  text "GND" at 48.4,25.5 h0.72 r90
  text "Y axis" at 4.45,21.5 h0.72
  text "470N" at 22.886,21.352 h0.72
  text "SN74LVC" at 33.425,20.6 h1.52
  text "100U" at 12.211,19.477 h0.72
  text "330" at 43.175,18.175 h0.72
  text "10K" at 23,17.775 h0.72
  text "100N" at 11.45,16.275 h0.72
  text "10N" at 16.375,16.275 h0.72
  text "330" at 43.3,16 h0.72
  text "1K" at 35.975,15.425 h0.72
  text "330" at 43.225,13.575 h0.72
  text "1K" at 35.836,12.477 h0.72
  text "0.1" at 12.061,11.602 h0.72
  text "330" at 43.275,11.375 h0.72
  text "0.1" at 12.111,9.402 h0.72
  text "Z" at 47.375,9.15 h1.01 r90
  text "DRV8825" at 23.375,8.1 h1.52 r90
  text "SN74LVC" at 33.775,7.025 h1.52
  text "Y2" at 47.375,6.875 h1.01 r90
  text "Y1" at 47.375,5.25 h1.01 r90
  text "10K" at 28.975,4.025 h0.72 r90
  text "X" at 47.375,3.825 h1.01 r90
  text "470N" at 22.336,3.727 h0.72
  text "Z axis" at 4.325,3.525 h0.72
  text "100U" at 12.361,2.002 h0.72
  text "1K" at 36.136,1.552 h0.72
Bottom Overlay:
  text "www.vertigotech.co.nz" at 39.875,70.575 h3.44 r90
  text "M3" at 33.375,65.875 h0.72
  text "M2" at 33.475,64.175 h0.72
  text "M1" at 33.475,62.4 h0.72
  text "1" at 30.125,61.375 h0.72
  text "DECAY" at 28.2,61.225 h0.72 r90
  text "1" at 31.075,60.475 h0.72
  text "2" at 31.2,59.225 h0.72
  text "3" at 31.25,57.875 h0.72
  text "M3" at 33.225,48.85 h0.72
  text "CORE S1" at 17.05,48.625 h3.44 r90
  text "M2" at 33.25,47.225 h0.72
  text "M1" at 33.2,45.45 h0.72
  text "DECAY" at 28.2,43.65 h0.72 r90
  text "1" at 31.175,43.125 h0.72
  text "2" at 31.3,41.875 h0.72
  text "3" at 31.275,40.35 h0.72
  text "M3" at 33.5,31 h0.72
  text "M2" at 33.575,29.3 h0.72
  text "M1" at 33.575,27.575 h0.72
  text "DECAY" at 28,26.175 h0.72 r90
  text "1" at 31.025,25.525 h0.72
  text "2" at 31.225,24.075 h0.72
  text "3" at 31.225,22.725 h0.72
  text "M3" at 33.375,16.1 h0.72
  text "M2" at 33.45,14.55 h0.72
  text "M1" at 33.175,12.625 h0.72
  text "DECAY" at 27.9,11.05 h0.72 r90
  text "1" at 31,10.5 h0.72
  text "2" at 31.2,9.05 h0.72
  text "3" at 31.15,7.625 h0.72

## Text inside footprints (layer, text, board x,y; h text height)
P3: Top Overlay "B+" at 2.525,42.525 h0.72 r270; Top Overlay "B-" at 2.525,45.025 h0.72 r270; Top Overlay "A-" at 2.525,47.525 h0.72 r270; Top Overlay "A+" at 2.525,50.025 h0.72 r270
P4: Top Overlay "B+" at 2.525,24.85 h0.72 r270; Top Overlay "B-" at 2.525,27.35 h0.72 r270; Top Overlay "A-" at 2.525,29.85 h0.72 r270; Top Overlay "A+" at 2.525,32.35 h0.72 r270
P5: Top Overlay "B+" at 2.525,7.175 h0.72 r270; Top Overlay "B-" at 2.525,9.675 h0.72 r270; Top Overlay "A-" at 2.525,12.175 h0.72 r270; Top Overlay "A+" at 2.525,14.675 h0.72 r270
P8: Top Overlay "B+" at 2.525,60.2 h0.72 r270; Top Overlay "B-" at 2.525,62.7 h0.72 r270; Top Overlay "A-" at 2.525,65.2 h0.72 r270; Top Overlay "A+" at 2.525,67.7 h0.72 r270